# EAGLE board SmartRock_4-pin_EC_Breakout-v5 (EAGLE 9.6.2)
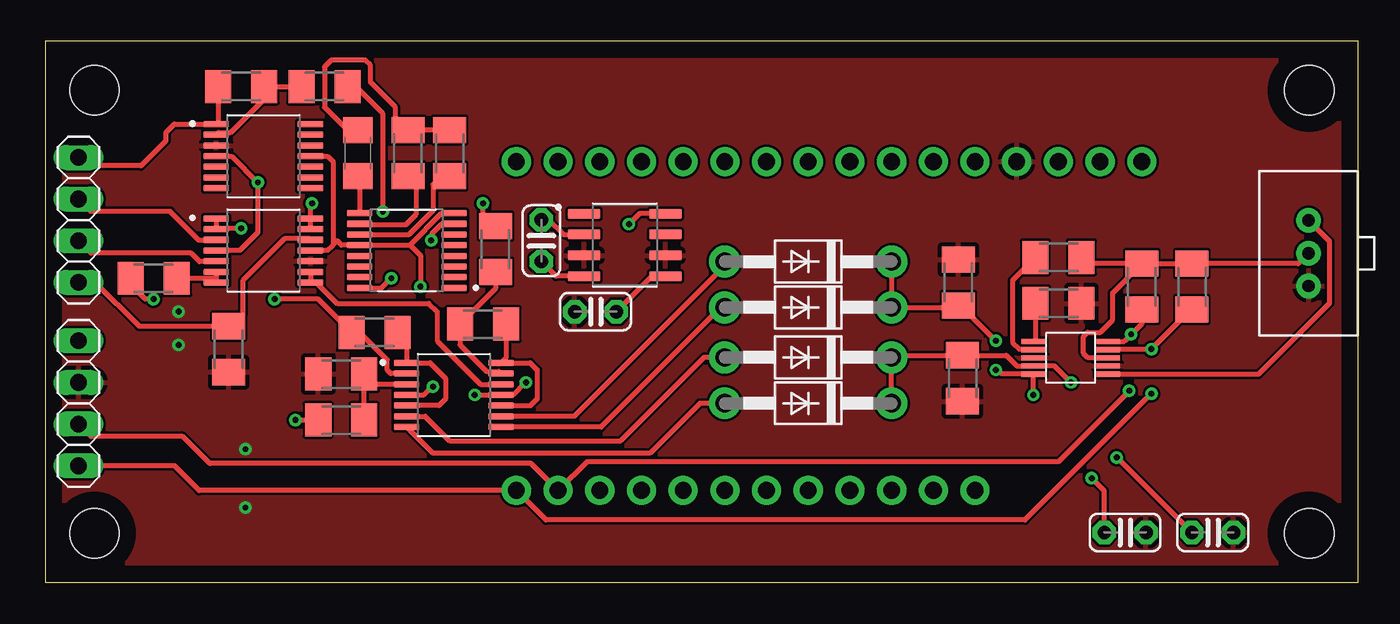
[diagram p0: board, top side]
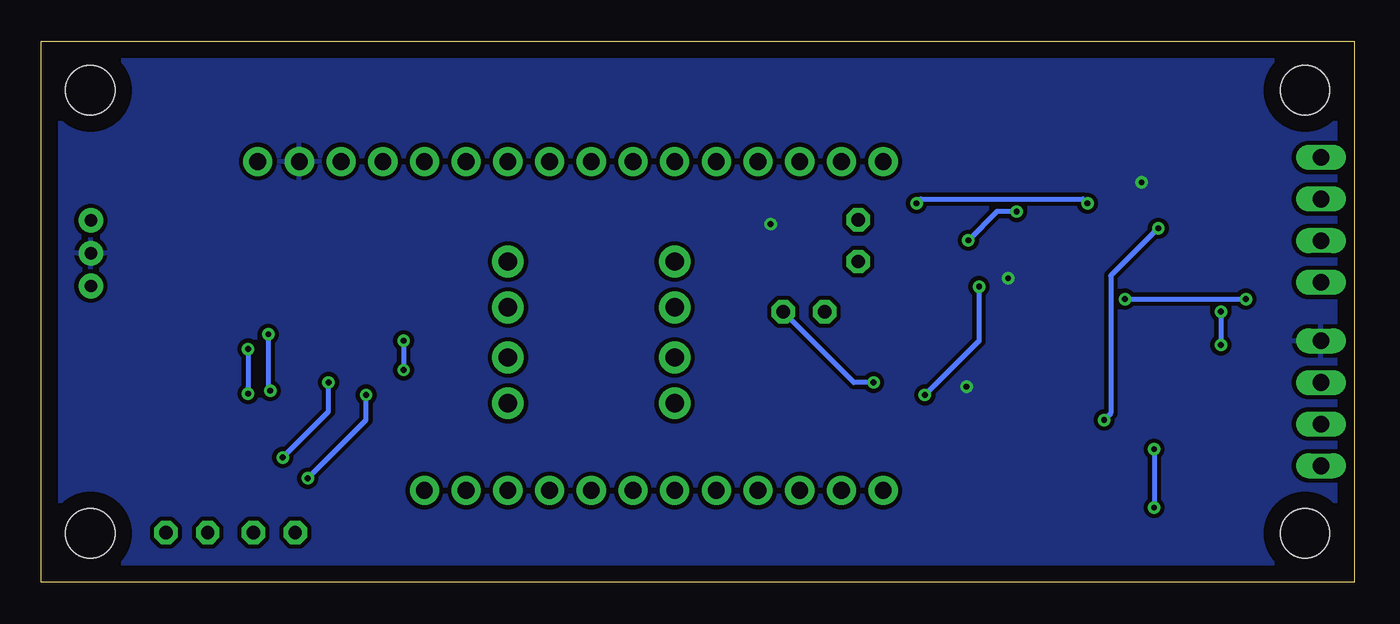
[diagram p1: board, bottom side, seen from below]

Size 80 x 33 mm. Coordinates in mm from the lower left corner, seen from the top.
Outline: 0,0 80,0 80,33 0,33 0,0
Copper layers (1*16): Top 0.035mm / dielectric 1.5mm / Bottom 0.035mm
Design rules "default": minimum track width 6mil, minimum drill 0.35mm, track to track 6mil, track to pad 6mil, pad to pad 6mil, via to via 6mil, smd to smd 6mil, copper to edge 40mil, drill to drill 6mil, minimum pad ring 10mil, minimum via ring 8mil, stop-mask expansion 4mil, vias tented up to drill 0mil, thermal gap 10mil
Net classes: 0 default: width 0.305 mm
Holes 3 mm at 3,30 3,3 77,30 77,3

## Footprints (pad centres in the part's own frame; a part is rotated, then mirrored left to right if it is on the bottom)
C025-024X044 = drill 0.813 pad 1.422 octagon: 1 -1.27,0; 2 1.27,0
C1206 = smd 1.6 x 1.8: 1 -1.4,0; 2 1.4,0
JST_3PIN_2MM = drill 0.75 pad 1.5: P$1 -2,0; P$2 0,0; P$3 2,0
DO41-10 = drill 1.118 pad 1.93: A 5.08,0; C -5.08,0
1X04 = drill 1.016 long: 1 -3.81,0; 2 -1.27,0; 3 1.27,0; 4 3.81,0
1X12-CB = drill 1.016 pad 1.778: 1 -13.97,0; 2 -11.43,0; 3 -8.89,0; 4 -6.35,0; 5 -3.81,0; 6 -1.27,0; 7 1.27,0; 8 3.81,0; 9 6.35,0; 10 8.89,0; 11 11.43,0; 12 13.97,0
1X15-CB = drill 1.016 pad 1.778: 1 -17.78,0; 2 -15.24,0; 3 -12.7,0; 4 -10.16,0; 5 -7.62,0; 6 -5.08,0; 7 -2.54,0; 8 0,0; 9 2.54,0; 10 5.08,0; 11 7.62,0; 12 10.16,0; 13 12.7,0; 14 15.24,0; 15 17.78,0
1X01-CLEANBIG = drill 1.016 pad 1.778: 1 0,0
M1206 = smd 1.6 x 2: 1 -1.4,0; 2 1.4,0
CD4060BPWR = smd 1.57 x 0.41: 1 -2.87,2.275; 2 -2.87,1.625; 3 -2.87,0.975; 4 -2.87,0.325; 5 -2.87,-0.325; 6 -2.87,-0.975; 7 -2.87,-1.625; 8 -2.87,-2.275; 9 2.87,-2.275; 10 2.87,-1.625; 11 2.87,-0.975; 12 2.87,-0.325; 13 2.87,0.325; 14 2.87,0.975; 15 2.87,1.625; 16 2.87,2.275
LT074CPWR = smd 1.57 x 0.41: 1 -2.87,1.95; 2 -2.87,1.3; 3 -2.87,0.65; 4 -2.87,0; 5 -2.87,-0.65; 6 -2.87,-1.3; 7 -2.87,-1.95; 8 2.87,-1.95; 9 2.87,-1.3; 10 2.87,-0.65; 11 2.87,0; 12 2.87,0.65; 13 2.87,1.3; 14 2.87,1.95
ADS1115 = smd 1.5 x 0.318: ADDR -0.75,2.5; AIN0 -0.75,1; AIN1 -0.75,0.5; AIN2 3.75,0.5; AIN3 3.75,1; ALERT/RDY -0.75,2; GND -0.75,1.5; SCL 3.75,2.5; SDA 3.75,2; VDD 3.75,1.5
MAX660MX/NOPB = smd 1.97 x 0.6: 1 -2.47,1.905; 2 -2.47,0.635; 3 -2.47,-0.635; 4 -2.47,-1.905; 5 2.47,-1.905; 6 2.47,-0.635; 7 2.47,0.635; 8 2.47,1.905

## Placement (x,y rotation side)
C1  1uF  [C025-024X044]  71.12,3.05 0 top
C2  1uF  [C025-024X044]  65.79,3.05 0 top
C3  1uF  [C025-024X044]  30.23,20.83 270 top
C4  1nF  [C1206]  19.05,26.16 90 top
C5  1uF  [C025-024X044]  33.53,16.51 0 top
CN2  JST_3PIN_2MM  [JST_3PIN_2MM]  76.96,20.07 90 top
D1  1N4004  [DO41-10]  46.48,13.72 180 top
D2  1N4004  [DO41-10]  46.48,10.92 180 top
D3  1N4004  [DO41-10]  46.48,19.56 180 top
D4  1N4004  [DO41-10]  46.48,16.76 180 top
JP1  [1X04]  2.03,10.92 90 top
JP2  [1X04]  2.03,22.1 270 top
JP4  [1X12-CB]  42.67,5.61 0 top
JP5  [1X15-CB]  46.48,25.65 180 top
JP6  [1X01-CLEANBIG]  66.8,25.65 180 top
R1  4.7k  [M1206]  17.02,30.23 180 top
R2  1k  [M1206]  11.94,30.23 0 top
R3  1k  [M1206]  18.03,9.91 0 top
R4  3.3k  [M1206]  20.07,15.24 0 top
R5  1k  [M1206]  6.6,18.54 180 top
R6  1k  [M1206]  27.43,20.32 270 top
R7  12k  [M1206]  26.67,15.75 0 top
R8  1M  [M1206]  55.63,18.29 270 top
R9  10k  [M1206]  61.72,19.81 0 top
R10  10k  [M1206]  61.72,17.02 180 top
R11  10k  [M1206]  66.8,18.03 90 top
R12  10k  [M1206]  69.85,18.03 90 top
R13  10k  [M1206]  22.1,26.16 90 top
R14  100k  [M1206]  24.64,26.16 90 top
R15  1M  [M1206]  55.88,12.45 90 top
R16  3.3k  [M1206]  18.03,12.7 180 top
TUNING_RESISTOR  200  [M1206]  11.18,14.22 270 top
U1  CD4060BPWR  [CD4060BPWR]  22.03,20.23 180 top
U2  TL074CPWR  [LT074CPWR]  13.29,25.98 0 top
U3  TL074CPWR  [LT074CPWR]  13.29,20.23 0 top
U4  TL074CPWR  [LT074CPWR]  24.89,11.43 0 top
U5  ADS1115  [ADS1115]  60.96,12.19 0 top
U6+  MAX660MX/NOPB  [MAX660MX/NOPB]  35.31,20.57 0 top

## Library data of the parts
C1-C5 D1-D4 JP4-JP6 R1-R16 TUNING_RESISTOR = adafruit
CN2 = JSTconnector
JP1 JP2 = pinhead
U1-U4 U6+ = PNNL_Wenner
U5 = my_lib

## Nets
!RESET: JP6.1
-VCC: C5.2 U1.8 U1.12 U2.11 U3.11 U4.11 U6+.5
A: R1.1 U1.7
AIN2: CN2.P$3 U5.AIN2
AREF: JP5.2
B: JP2.4 TUNING_RESISTOR.1 U3.12
CAP1: C1.1 D1.C D2.C R15.2 U5.AIN0
CAP2: C2.1 D3.C D4.C R8.2 U5.AIN1
EN: JP4.11
GND: C1.2 C2.2 C5.1 CN2.P$1 JP1.3 JP5.3 R8.1 R10.1 R15.1 R16.2 TUNING_RESISTOR.2 U2.3 U3.10 U5.AIN3 U5.GND U6+.3 U6+.6
GPIO5: JP4.3
GPIO6: JP4.4
GPIO9: JP4.5
GPIO10: JP4.6
GPIO11: JP4.7
GPIO13: JP4.9
GPIOA0: JP5.4
GPIOA1: JP5.5
GPIOA2: JP5.6
GPIOA3: JP5.7
GPIOA4: JP5.8
GPIOA5: JP5.9
GPIOMOSI: JP5.11
GPIORX: JP5.13
GPIOSCK: JP5.10
GPIOTX: JP5.14
GPSIOMISO: JP5.12
M: JP2.2 U3.3
N: JP2.3 U3.5
N$1: R3.2 R16.1 U4.3
N$2: R4.1 R5.2 U4.2
N$3: R1.2 R2.2 U2.2
N$4: D1.A U4.6
N$5: R6.2 R7.1 U4.13
N$6: D3.A U4.9
N$7: C3.1 U6+.2
N$8: C3.2 U6+.4
N$10: C4.1 U1.9
N$11: R13.1 U1.10
N$12: R14.1 U1.11
N$13: R10.2 U5.ADDR
N$15: R9.1 U5.ALERT/RDY
N$17: C4.2 R13.2 R14.2
NC: JP5.15
OUT1: R3.1 U3.1 U3.2
OUT1B: R4.2 U4.1 U4.5
OUT2: R5.1 U3.6 U3.7
OUT2B: D2.A U4.7
OUT3: U3.8 U3.9 U4.12
OUT3B: D4.A U4.8
OUT4: R6.1 U3.13 U3.14
OUT4B: R7.2 U4.10 U4.14
SCALE_A: JP2.1 R2.1 U2.1
SCL: JP1.2 JP4.2 R11.1 U5.SCL
SDA: JP1.1 JP4.1 R12.1 U5.SDA
USB: JP4.10
VBAT: JP4.12
VCC: CN2.P$2 JP1.4 JP5.1 R9.2 R11.2 R12.2 U1.16 U2.4 U3.4 U4.4 U5.VDD U6+.8

## Tracks (layer width: path | path; a pad name or v marks a point on that pad's centre or on a via)
-VCC  (via drill 0.35)
  Top 0.305: U2.11 17.2,25.98 17.53,25.65 17.53,20.57 | 17.53,20.57 17.19,20.23 U3.11 | 17.53,20.57 17.78,20.83 18.05,20.56 U1.12 19.18,20.57 22.23,20.57 | U1.8 24.16,22.51 22.23,20.57 | C5.2 36.96,18.67 U6+.5 | v29.29,12.19 29.27,12.19 28.52,11.44 27.77,11.44 U4.11 v26.16,11.43 | 22.23,20.57 22.86,19.94 v22.86,18.03
  Bottom 0.305: C5.2 30.48,12.19 v29.29,12.19 | v22.86,18.03 22.86,14.73 v26.16,11.43
A  (via drill 0.35)
  Top 0.305: R1.1 18.93,30.23 20.54,28.61 20.54,22.64 v20.57,22.61 | v23.51,20.85 23.56,20.9 23.56,21.26 24.16,21.86 U1.7
  Bottom 0.305: v20.57,22.61 21.76,22.61 v23.51,20.85
AIN2
  Top 0.305: CN2.P$3 78.23,20.8 78.23,17.02 73.91,12.69 U5.AIN2
B
  Top 0.305: U3.12 16.09,20.95 14.6,20.95 12.04,18.39 12.04,16.36 11.31,15.62 TUNING_RESISTOR.1 5.71,15.62 3.05,18.29 JP2.4
CAP1  (via drill 0.35)
  Top 0.305: D2.C D1.C 51.69,13.85 R15.2 58.54,13.85 59.2,13.19 U5.AIN0 61.48,13.19 v62.48,12.19 | C1.1 v65.28,7.62
  Bottom 0.305: v65.28,7.62 62.48,10.41 v62.48,12.19
CAP2  (via drill 0.35)
  Top 0.305: D3.C D4.C 55.88,16.76 | R8.2 55.76,16.89 55.88,16.76 | 55.88,16.76 v57.91,14.73 | v57.91,12.95 58.03,12.95 58.25,12.73 60.17,12.73 U5.AIN1 60.2,12.68 v60.2,11.43 | C2.1 64.52,5.59 v63.75,6.35
  Bottom 0.305: v57.91,14.73 v57.91,12.95 | v63.75,6.35 60.2,9.91 v60.2,11.43
GND  (via drill 0.35)
  Bottom 0.305: v8.13,16.51 v8.13,14.48 | v12.19,8.13 v12.19,4.57
  pour Top (isolate 0.152): -2.54,36.76 82.54,36.76 82.54,-2.56 -2.54,-2.56
M
  Top 0.305: JP2.2 2.79,22.61 7.62,22.61 9.34,20.88 U3.3
N
  Top 0.305: U3.5 10.39,19.56 9.4,19.56 8.89,20.07 2.79,20.07 JP2.3
N$1
  Top 0.305: U4.3 20.05,12.08 R16.1 R3.2
N$2  (via drill 0.35)
  Top 0.305: U4.2 21.05,12.73 20.83,12.95 20.83,13.56 19.15,15.24 R4.1 16.63,17.27 v13.97,17.27 | v6.6,17.27 6.1,17.27 5.2,18.16 R5.2
  Bottom 0.305: v13.97,17.27 v6.6,17.27
N$3
  Top 0.305: U2.2 10.56,27.42 11.3,27.42 13.34,29.46 R2.2 R1.2
N$4
  Top 0.305: D1.A 40.13,13.72 35.05,8.64 24.64,8.64 23.14,10.13 U4.6
N$5
  Top 0.305: R6.2 27.43,17.91 R7.1 25.27,14.48 26.88,12.87 27.62,12.87 U4.13
N$6
  Top 0.305: D3.A 41.4,19.3 32.23,10.13 U4.9
N$7
  Top 0.305: C3.1 30.68,22.1 31.57,21.21 U6+.2
N$8
  Top 0.305: U6+.4 31.11,18.67 C3.2
N$10
  Top 0.305: C4.1 19.16,24.65 U1.9
N$11
  Top 0.305: U1.10 19.29,21.86 19.36,21.79 21.95,21.79 22.58,22.43 22.58,24.28 R13.1
N$12
  Top 0.305: U1.11 22.18,21.21 23.62,22.65 23.62,24.25 24.13,24.76 R14.1
N$13
  Top 0.305: R10.2 60.32,14.8 U5.ADDR
N$15
  Top 0.305: R9.1 58.93,18.42 58.93,14.63 59.33,14.23 60.17,14.23 U5.ALERT/RDY
N$17
  Top 0.305: R14.2 R13.2 21.34,28.32 21.34,28.96 19.81,30.48 19.81,31.52 19.5,31.83 17.42,31.83 17.02,31.43 17.02,28.96 18.41,27.56 C4.2
OUT1  (via drill 0.35)
  Top 0.305: U3.1 U3.2 10.47,21.59 v11.94,21.59 | v15.24,9.91 R3.1
  Bottom 0.305: v11.94,21.59 14.83,18.69 14.83,10.31 v15.24,9.91
OUT1B
  Top 0.305: R4.2 22.02,14.68 U4.1 23.45,13.38 24.38,12.45 24.38,11.18 23.99,10.78 U4.5
OUT2
  Top 0.305: U3.6 10.42,18.54 | 10.42,18.54 U3.7 | R5.1 10.42,18.54
OUT2B
  Top 0.305: D2.A 39.88,10.92 36.83,7.87 23.63,7.87 U4.7
OUT3
  Top 0.305: U4.12 26.53,12.08 23.88,14.73 23.88,16.51 23.37,17.02 17.78,17.02 16.51,18.28 U3.8 U3.9
OUT3B
  Top 0.305: D4.A 41.15,16.76 33.86,9.48 U4.8
OUT4  (via drill 0.35)
  Top 0.305: U3.13 U3.14 16.16,23.01 v16.26,23.11 | R6.1 26.67,22.48 v26.67,23.11
  Bottom 0.305: v26.67,23.11 26.42,23.37 16.51,23.37 v16.26,23.11
OUT4B
  Top 0.305: R7.2 28.07,13.69 U4.14 29.55,13.38 29.97,12.95 29.97,11.18 29.58,10.78 U4.10
SCALE_A
  Top 0.305: JP2.1 2.54,25.4 5.84,25.4 7.37,26.92 7.37,27.43 7.87,27.93 U2.1 10.54,28.06 R2.1
SCL  (via drill 0.35)
  Top 0.305: U5.SCL 65.73,14.69 v66.16,15.12 66.8,15.77 R11.1 | v66.04,11.68 61.72,7.37 32.99,7.37 JP4.2 29.6,7.25 10.02,7.25 8.38,8.89 2.79,8.89 JP1.2
  Bottom 0.305: v66.16,15.12 66.16,11.8 v66.04,11.68
SDA  (via drill 0.35)
  Top 0.305: U5.SDA 64.75,14.23 v67.39,14.23 69.8,16.63 R12.1 | v67.39,11.51 59.69,3.81 30.5,3.81 JP4.1 9.37,5.61 7.87,7.11 JP1.1
  Bottom 0.305: v67.39,14.23 v67.39,11.51
VCC  (via drill 0.35)
  Top 0.305: U5.VDD 63.52,13.69 63.25,13.97 63.25,14.99 63.5,15.24 64.26,15.24 65.02,16 65.02,17.66 R11.2 | R11.2 R12.2 76.33,19.43 CN2.P$2 | R11.2 63.5,19.43 R9.2 | U2.4 11.35,25.98 v12.95,24.38 12.95,21.34 11.85,20.23 U3.4 | U1.16 20.5,17.96 v21.08,18.54 | U4.4 23.04,11.43 23.55,11.94 v23.62,11.94 | U6+.8 36.2,22.48 v35.56,21.84
  pour Bottom (isolate 0.254): -1.27,35.49 81.27,35.49 81.27,-1.29 -1.27,-1.29